# Altium PCB lps_regulator_rev_12.PcbDoc (part 2 of 2)
Units mil, origin at the board's own origin, x right, y up, seen from the top; angles counter-clockwise.
Board outline 5361 x 2466 mil, 2 copper layers (Top Layer, Bottom Layer); 130 components, 56 nets, 346 pads, 191 vias.
Unrouted connection lines stored in the file: 43.
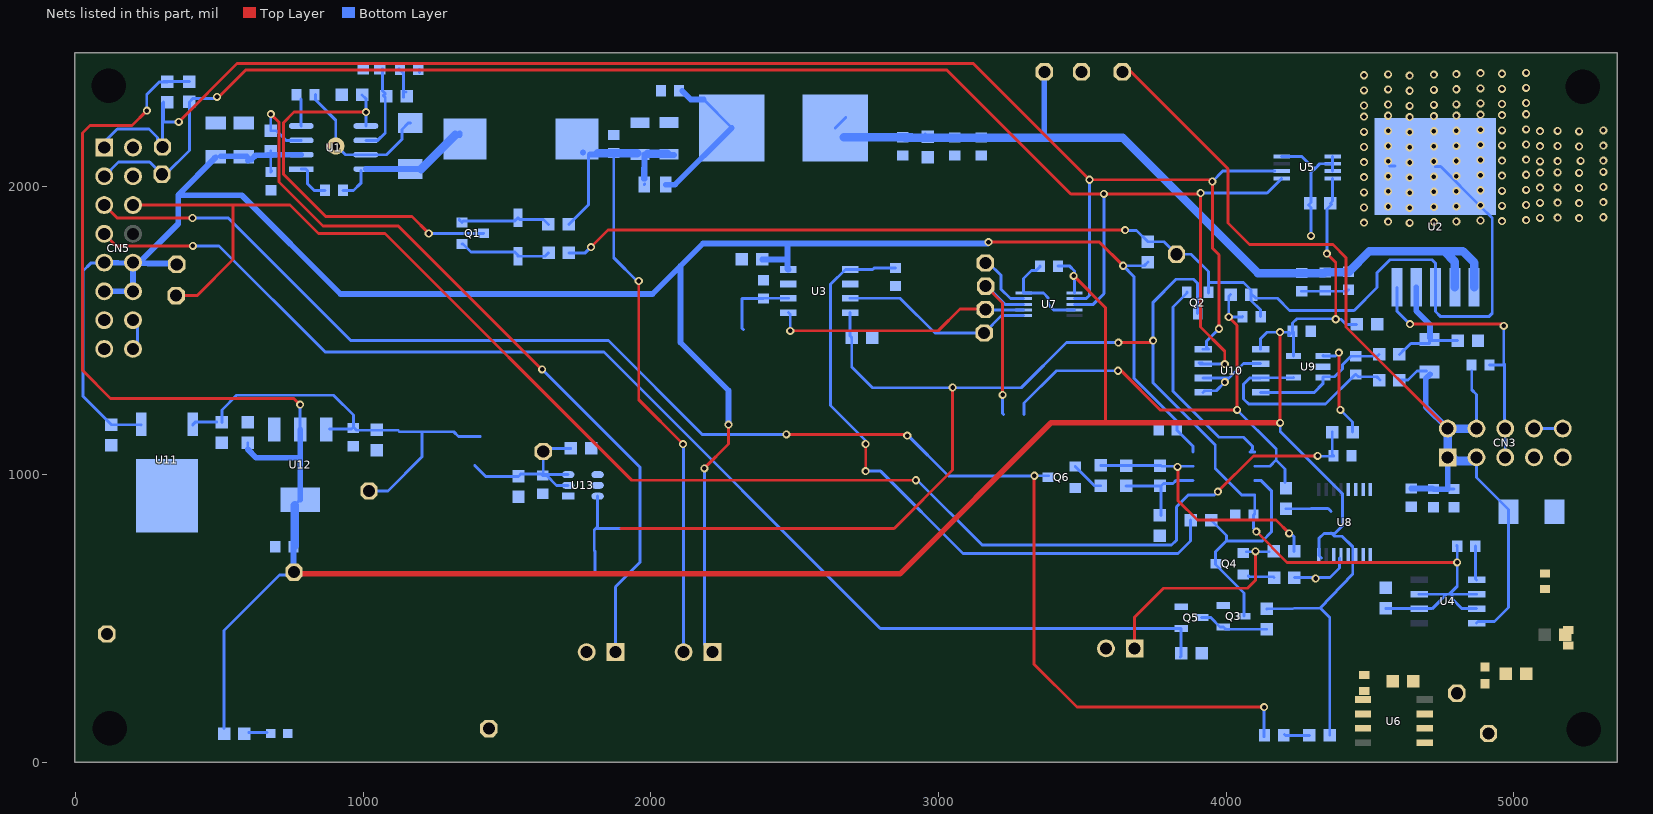
[diagram p2: the nets of this part, all layers, seen from the top]

## Part data (continued)
U8: library part CMP-001-1190-01, "IC I/O EXPANDER I2C 8B 16TSSOP", Case/Package=TSSOP, Frequency=400kHz, Max Operating Temperature=85°C, Min Operating Temperature=-40°C, Contact Plating=Gold, Interface=I2C, Lead Free="Lead Free", Mount="Surface Mount", Number of I/Os=8, Number of Outputs=8, Number of Pins=16, Packaging="Tape and Reel"
U10: "Current Monitor IC"
U11: library part CMP-001-0685-01, "STMICROELECTRONICS         LD29150DT33R            Fixed LDO Voltage Regulator, 4.3V to 30V, 400mV Dropout, 3.3Vout, 1.5Aout, TO-252-3", Case/Package=TO-252, Dropout Voltage=400mV, Input Bias Current=15mA, Max Input Voltage=30V, Max Operating Temperature=125°C, Max Output Current=1.5A, Max Output Voltage=3.333V, Min Input Voltage=4.3V, Min Operating Temperature=-40°C, Min Output Voltage=3.3V, Output Voltage Accuracy=1%, Package Quantity=1, Reference Voltage=1.2423V, Accuracy=1%, Contact Plating="Matte, Tin", Height=2.4mm, Lead Free="Lead Free", Length=6.6mm, Max Supply Voltage=30V, Min Supply Voltage=4.3V, Mount="Surface Mount", Nominal Output Voltage=3.3V, Number of Outputs=1, Number of Pins=3, Number of Regulators=1, Output Current=1.5A, Output Type=Fixed, Output Voltage=3.3V, Packaging="Tape and Reel", Polarity=Positive, Quiescent Current=15mA, Radiation Hardening=No, REACH SVHC="No SVHC", Termination=SMD/SMT, Weight=0.01lb, Width=6.2mm
U12: library part CMP-008-0010-01, "3.3 volt fixed regulator, 800mA", Component Name=LD1117S33, Pin Count=4

## Free pads (board coordinates)
  round 110 hole 120 unplated: 0(116,2352) 0(119,118) 0(5239,2348) 0(5243,115)

## Via types
v1: diameter 28, hole 16, Top Layer to Bottom Layer, 191 vias

## Nets (pads, with @x,y where several pads share a name; then routed paths per layer and width w, separated by ;. In a path a pad name is that pad's centre, name@x,y a point inside that pad or via, vN(x,y) a via of type N, cw(c..) or ccw(c..) an arc to the next point about the centre after c; other vN are vias at no path point)
3V3: 1.1 C27.1 C30.1 C36.1 C39.1 C43.1 C45.1 R13.1 R14.1 R24.1 R26.1 R29.1 R32.1 U5.8 U7.1 U8.16 U9.5 U10.5 U12.2 U12.4 | length 10929
  Top Layer w10: v1(248,2265) 197,2214 50,2214 24,2188 24,1363 122,1265 759,1265 v1(781,1243) ; v1(3470,1691) 3580,1581 3580,1182.12 ; 3580,1180 3580,1182.12 ; 3582,1180.12 3580,1182.12 ; v1(4187.15,1495) 4187.15,1180.85 v1(4187.88,1180.12) ; v1(4350,1768) 4381,1737 v1(4381,1540)
  Top Layer w20: 1.1@760,661 766,655 2866,655 3391,1180 3580,1180 ; 3582,1180.12 v1(4187.88,1180.12)
  Bottom Layer w10: v1(248,2265) 248,2321.12 292.31,2365.43 R13.1@319,2365.43 ; R13.1@306,2366.43 R14.1@396,2366.43 ; R32.1@516.57,118 516.57,458.57 709,651 750,651 1.1@760,661 1.1@757.5,663.5 ; 599,1088 C45.1@599,1110.57 ; C43.1@757.5,749 762,753.5 C43.1@770.21,761.72 ; U12.4@762,893.95 U12.4@781,912.95 ; 778,1059 781,1062 ; U12.2@781,1157.05 v1(781,1243) ; C30.1@3415.38,1724.56 3456.32,1724.56 3472.88,1708 U7.1@3472.88,1631.37 ; U10.5@4120,1436 4120,1473 4142,1495 v1(4187.15,1495) 4218.29,1495 4218.29,1483.31 4231.01,1496.03 C39.1@4231.01,1498 ; 4141,533.43 4327.43,536.43 4440,654 4440,749 4403.13,785.87 4376.49,785.87 4366.76,795.6 ; v1(4187.88,1180.12) 4187.88,1150.12 4405,933 4405,823 4377.6,795.6 4366.76,795.6 ; U9.5@4234,1412.4 4234,1495.01 C39.1@4231.01,1498 ; 4329.93,533.93 4360,503.87 R24.1@4360,94 ; 4331.5,710 4322.76,718.75 4322.76,778.76 4339.6,795.6 4366.76,795.6 ; v1(4350,1768) 4350,1923.43 4366,1939.43 C27.1@4362.43,1943 4370.17,1950.73 U5.8@4370.17,2029.41 ; 4364.76,797.6 4366.76,795.6 ; C36.1@4453.57,1522 4417.26,1522 4399.26,1540 v1(4381,1540) 4379,1542 4246,1542 4231.01,1527.01 C39.1@4231.01,1498
  Bottom Layer w20: 599,1088 628,1059 778,1059 ; 1.1@757.5,663.5 C43.1@757.5,749 ; U12.4@781,912.95 781,1062 U12.2@781,1157.05
  Bottom Layer w30: C43.1@762,753.5 U12.4@762,893.95
+5V0: +1.1 +2.1 C40.1 C41.1 C46.1 R17.1 U11.3 U12.3 U13.3 U13.4 | length 1532.8
  Bottom Layer w10: U11.3@407.9,1173.09 418.3,1183.5 C40.1@491,1183.5 ; C40.1@509,1181.43 509,1225 560,1276 897,1276 966,1207 C41.1@966,1165.87 ; U12.3@883.55,1159.05 959.18,1159.05 C41.1@966,1165.87 ; +2.1@1020,943 1085.98,943 1205,1062.02 1205,1149 ; 1121.6,1154.4 977.46,1154.4 C41.1@966,1165.87 ; 1127,1149 1205,1149 ; 1407,1132 1332,1132 1315,1149 1205,1149
+VIN_SW: +VIN_SW1.1 C1.1 C4.1 C5.1 C24.1 C29.1 C42.1 CN1.1 CN5.5 CN5.6 CN5.13 CN5.14 R1.1 R6.1 U1.2 U3.8 U11.1 | length 8111.5
  Top Layer w10: v1(2186,1022) 2270,1106 v1(2270,1174) ; v1(3174,1808) 3560,1808 v1(3642,1726)
  Top Layer w20: +VIN_SW1.1@352,1744 +VIN_SW1.1@357.75,1749.75
  Bottom Layer w10: CN5.5@100,1735 53,1735 26,1708 26,1272.43 C42.1@125,1173.43 228.03,1173.43 U11.1@228.37,1173.09 ; CN5.13@200,1735.03 CN5.13@200,1737 CN5.13@222,1737 ; +VIN_SW1.1@352,1731 +VIN_SW1.1@352,1734 ; 357,1971 357,1972 ; C5.1@479,2104.94 C5.1@487,2104.94 ; R1.1@679,2124.57 679,2112 679,2110.5 679,2052.5 C1.1@680,2051.5 ; C1.1@682,2055.5 C1.1@682.5,2056 ; v1(2186,1022) 2186,411 CN1.1@2214,383 ; 2470,1748 2475,1743 ; R6.1@3728,1738.57 3715.43,1726 v1(3642,1726) 3679,1689 3679,1336 3828.5,1186.5 C24.1@3828.5,1155 3884.72,1098.78 3884.72,1079
  Bottom Layer w20: CN5.6@100,1637 CN5.14@200,1637 200,1735.03 221.95,1734.59 252,1734 +VIN_SW1.1@352,1734 ; CN5.5@100,1737 CN5.13@199.96,1735.03 ; CN5.13@222,1737 357,1872 357,1971 578,1971 921,1628 2006,1628 2103,1725 ; 357,1972 C5.1@488,2103 ; C5.1@505,2107 C4.1@595,2107 ; C4.1@599.57,2092 C4.1@605.15,2097.59 ; C4.1@612.15,2095.59 627.07,2110.5 679,2110.5 R1.1@685,2110.5 ; R1.1@667.5,2112 679,2112 U1.2@785,2112 ; v1(2270,1174) 2270,1292 2103,1459 2103,1725 ; C29.1@2387,1748 2470,1748 ; U3.8@2478.43,1713 2476.81,1713 2475,1714.81 2475,1743 2475,1803 ; v1@3171,1803 2475,1803 ; 2103,1725 2181,1803 2475,1803
-2V5: C25.1 C31.2 Q2.3 U3.4 | length 5965.5
  Top Layer w10: 1896,813 2846,813 3049,1016 v1(3049,1303) ; v1(3625,1459) 3739.62,1459 v1(3746.31,1465.69) ; v1(4105,802) 4212,695 v1(4803,695)
  Bottom Layer w10: 1805.43,659 1805.43,734.06 1804.5,735 1803.43,736.06 1803.43,808 1808.43,813 ; 1815,925.2 1815,819.57 1808.43,813 ; 1896,813 1808.43,813 ; U3.4@2693,1563 2693,1481.57 C31.2@2698.57,1476 2698.57,1374.43 2770,1303 ; 2770,1302 3288,1302 3445,1459 v1(3625,1459) ; Q2.3@3901,1559.44 3901,1664 3886,1679 3826,1679 3746.31,1599.31 v1(3746.31,1465.69) 3746.31,1318.69 3962,1103 3962,1021 4054,929 4099.28,929 4099.28,863.79 C25.1@4094.5,859 4094.5,812.5 v1(4105,802) ; 4555,535.57 4556.57,534 4670.61,534 4716.17,534 4766.17,584 ; 4670.61,584 4766.17,584 ; 4801.56,753 4803.11,751.44 4803.11,611.72 4775.39,584 ; 4870.61,534 4820.05,534 4784.61,569.44 4784.61,584 ; 4870.61,584 4784.61,584 ; 4766.17,584 4775.39,584 ; 4775.39,584 4784.61,584
-5V0: -1.1 C28.2 C37.1 C38.1 R10.2 R31.1 U4.2 U4.3 U4.6 U4.7 U13.1 | length 631.8
  Bottom Layer w10: 1388,1032 1426,994 C37.1@1540,994 1548.8,1002.8 C38.1@1626,1002.8 ; 1712.64,962.6 1672.4,962.6 1638.5,996.5 C38.1@1624,996.5 C38.1@1626,998.5 ; 1712.64,1000 1638.5,1000 1627.5,1000 C38.1@1626,998.5 ; R31.1@1721.57,1091 1637,1091 -1.1@1626,1080 C38.1@1626,1002.8 ; C38.1@1626,998.5 C38.1@1626,1002.8
/INT: CN5.10 R29.2 U8.13
/RST: CN5.9
Current_Limit: CN5.3 LED1.2 Q6.3 U8.4 | length 5359.8
  Top Layer w10: CN5.3@100,1937 145,1892 v1(407,1892) ; v1(2471,1140) 2887,1140 v1(2891.5,1135.5) ; v1@3332,994 3332,341 3481,192 v1(4132,192)
  Bottom Layer w10: CN5.3@100,1937 CN5.3@109,1937 ; v1(407,1892) 531,1892 957,1466 1853,1466 2179,1140 v1(2471,1140) ; v1@2893,1137 3035,995 v1@3342,995 ; 3282.76,996 v1(3333.04,996) Q6.3@3383.32,996 ; LED1.2@4131,89 4132,90 4132,190 4131,191 v1(4132,192)
Debug_LED: LED2.2 U8.6
GND: C1.2 C2.2 C3.2 C4.2 C5.2 C6.2 C8.2 C9.2 C10.2 C11.2 C12.2 C13.2 C14.2 C15.2 C16.2 C17.2 C18.2 C19.2 C20.2 C22.1 C24.2 C25.2 C27.2 C28.1 C29.2 C30.2 C31.1 C33.2 C34.2 C36.2 C37.2 C38.2 C39.2 C40.2 C41.2 C42.2 C43.2 C45.2 C46.2 CN2.2 CN3.4 CN3.5 CN3.9 CN3.10 CN4.2 CN5.7 CN5.8 CN5.15 CN5.16 D2.1 D3.1 GND1.1 GND2.1 GND3.1 GND4.1 LED3.2 Q3.2 Q5.2 Q6.2 R5.2 R7.2 R18.1 R22.2 R23.2 R31.2 U1.7 U1.9 U3.5 U5.4 U5.5 U5.6 U5.7 U7.4 U7.10 U8.1 U8.2 U8.3 U8.8 U9.2 U10.1 U10.2 U10.6 U11.4 U12.1 U13.2 | length 2303
  Top Layer w10: CN5.8@110,1436 CN5.8@112.44,1433.56
  Bottom Layer w10: CN5.16@215,1437 CN5.15@215,1537 ; C20.2@835,2321 835,2302 905,2232 U1.9@905,2142 908.64,2142 938.64,2112 U1.7@1009.41,2112 1081,2112 1135,2166 1135,2200.04 1156.96,2222 D2.1@1164.46,2222 ; R5.2@1195.43,2398.03 R5.2@1195.43,2409 ; C30.2@3352.39,1724.56 3352.39,1722.59 3339.67,1709.87 3323.76,1709.87 3295.72,1681.83 U7.10@3295.72,1631.37 3364.51,1631.37 3380.88,1615 3380.88,1592 3400.57,1572.32 U7.4@3472.88,1572.32 ; U10.1@3920,1286 3925.5,1291.5 3965.5,1291.5 v1(3995.5,1321.5) 4010,1336 ; U10.2@3920,1336 4010,1336 ; U10.6@4120,1386 4060,1386 4010,1336 ; U5.4@4193,2106.18 4262.82,2106.18 4303.7,2065.3 4310.3,2065.3 ; R22.2@4237.43,642 4361,642 4394.5,675.5 4394.5,710 ; C12.2@4262.49,1637.5 4420,1637.5 C14.2@4425,1642.5 ; v1(4295,1830) 4295,1928.43 4286,1937.43 C27.2@4291.57,1943 4295,1946.43 4295,2050 4310.3,2065.3 ; U5.7@4370.17,2055 U5.5@4370.17,2080.59 ; U5.6@4370.17,2106.18 U5.5@4370.17,2080.59 ; CN3.9@5070,1160 CN3.10@5170,1160 ; 4310.3,2065.3 4325.59,2080.59 U5.5@4370.17,2080.59
  other v1: 4311,639
I2C_SCL: CN5.1 I2.1 R13.2 U5.2 U7.2 U8.14 U10.4 | length 5728.4
  Top Layer w10: v1(359,2226) 562,2429 3121,2429 v1(3525,2025) 3946,2025 v1(3952,2019) 3952,1787 3975,1764 v1(3975,1507)
  Bottom Layer w10: CN5.1@100,2135 CN5.1@101,2136 ; CN5.1@100,2137 100,2156 145.5,2201.5 255.5,2201.5 285.5,2171.5 285.5,2155.57 I2.1@302.5,2138.57 302.5,2292.07 306,2295.57 306,2226 v1(359,2226) ; U7.2@3472.88,1611.69 3513.45,1611.69 3519,1617.23 ; 3519.23,1617.46 3525,1623.23 v1(3525,2025) ; U10.4@3920,1436 3939,1436 3931,1444 3931,1463 v1(3975,1507) ; v1(3952,2019) 3988,2055 U5.2@4169,2055
I2C_SDA: CN5.2 I1.1 R14.2 U5.1 U7.3 U8.15 U10.3 | length 5782.4
  Top Layer w10: v1(492,2313) 498,2313 592,2407 3029,2407 3460,1976 v1(3575,1976) 3908,1976 v1(3911,1979) 3911,1513 3995,1429 v1(3995,1384)
  Bottom Layer w10: CN5.2@100,2037 150,2087 258,2087 I1.1@301,2044 313,2044 396,2127 R14.2@396,2295.57 407.43,2307 486,2307 v1(492,2313) ; U7.3@3472.88,1592 3538,1592 3575,1629 v1(3575,1976) ; v1(3911,1979) 4142.59,1979 U5.1@4193,2029.41 ; U10.3@3920,1386 3917.5,1388.5 3905.5,1388.5 3910,1384 v1(3995,1384)
I_Sample: C34.1 CN5.11 I_sample1.1 R25.2 U6.3 | length 5435.4
  Top Layer w10: CN5.11@200,1937 548,1937 ; I_sample1.1@350,1622 422,1622 548,1748 548,1937 ; v1(2921.5,980.5) 1933.5,980.5 1076,1838 845,1838 746,1937 548,1937 ; v1(3971,941) 4095,1065 v1(4318,1065)
  Bottom Layer w10: I_sample1.1@348.5,1620.5 I_sample1.1@350,1622 351.5,1623.5 I_sample1.1@356.5,1623.5 ; I_sample1.1@354,1616 359,1621 376,1621 371,1616 I_sample1.1@359,1616 ; v1@2924,983 3152,755 3551,755 3551.09,754.91 3809.91,754.91 3827,772 3827,888.02 3867.98,929 3884.72,929 3959,929 v1(3971,941) ; v1(4318,1065) 4318.97,1064.03 4373.01,1064.03 C34.1@4373.01,1066 4368.57,1070.44 R25.2@4368.57,1148
IA_TP: IA_TP1.1 R20.1 U7.7 | length 935.2
  Top Layer w10: v1(2484.72,1500) 2999,1500 3075,1576 3157,1576 IA_TP1.1@3166.93,1585.93 ; IA_TP1.1@3149.95,1561.07 IA_TP1.1@3162.88,1574
  Bottom Layer w10: 2478.43,1563 2484.72,1556.72 v1(2484.72,1500) ; IA_TP1.1@3162.88,1574 3164.57,1572.32 U7.7@3295.72,1572.32
NetC6_1: C6.1 C8.1 C9.1 CN1.2 FB1.1 L1.2 R3.1 | length 2542.1
  Top Layer w10: v1(1958,1673) 1958,1260 v1(2112,1106)
  Bottom Layer w10: R3.1@1715,1870 1783,1938 1783,2107.12 L1.2@1788.88,2113 ; C6.1@1871,2117.5 1871,2116.5 1871,1754 v1@1954,1671 ; FB1.1@1977.2,2008 FB1.1@1979,2009.8 ; C8.1@2058.44,2109.32 2060,2110.88 C8.1@2063,2113.88 ; CN1.2@2114,383 v1@2114,1101
  Bottom Layer w20: L1.2@1764.13,2119.52 L1.2@1764.19,2119.57 ; L1.2@1788.88,2113 1819.5,2113 L1.2@1816,2116.5 ; FB1.1@1975.78,2028.88 1977.65,2111.53 1977.69,2113.2 1977.7,2112.13 FB1.1@1979,2028.8 ; C8.1@2060,2110.88 C8.1@2081,2110.88
  Bottom Layer w30: L1.2@1816,2116.5 1871,2116.5 C9.1@1953,2116.5 ; C9.1@1989,2114.88 C8.1@2056.44,2114.88
NetC7_1: C7.1 U1.1 | length 139.6
  Bottom Layer w10: U1.1@785,2062 801.16,2062 806,2057.16 806,2012 830,1988 C7.1@867.5,1988
NetC7_2: C7.2 D2.2 L1.1 U1.8 | length 504.9
  Bottom Layer w10: C7.2@930.5,1988 967,1988 992,2013 U1.8@992,2057.53 ; L1.1@1336,2180.53 L1.1@1340.47,2185
  Bottom Layer w20: U1.8@1009.41,2062 D2.2@1164.46,2062 D2.2@1202,2062 ; L1.1@1320.53,2180.53 1336,2180.53 L1.1@1336,2187
  Bottom Layer w30: D2.2@1202,2062 L1.1@1320.53,2180.53
NetC15_1: C15.1 FB1.2 L2.1 | length 537
  Bottom Layer w10: L2.1@2183.97,2304 2281,2206.97 L2.1@2281,2205
  Bottom Layer w20: FB1.2@2052,2008 2084,2008 L2.1@2281,2205 ; C15.1@2109.14,2334 2139.14,2304 L2.1@2183.97,2304
NetC20_1: C20.1 U1.4 | length 94.6
  Bottom Layer w10: C20.1@783.57,2306 783.57,2213.43 U1.4@785,2212
NetC21_1: C21.1 C22.2 U1.6 | length 302.3
  Bottom Layer w10: U1.6@1009.41,2162 1051,2162 1077,2188 1077,2311 C21.1@1070,2318 ; C22.2@1067.54,2411 1067.54,2334.46 C21.1@1075,2327 ; C21.1@1076,2322 C21.1@1076,2326
NetC21_2: C21.2 R5.1 | length 105.6
  Bottom Layer w10: R5.1@1124.5,2411 1140.43,2395.07 C21.2@1140.43,2312
NetC23_1: C23.1 Q2.2 R6.2 R8.2 R9.1 TP1.1 U2.3 U2.6 | length 4431
  Top Layer w10: v1(1792,1791) 1851,1850 v1(3649,1850)
  Bottom Layer w10: R8.2@1715.43,1771 1772,1771 v1(1792,1791) ; v1(3649,1850) 3650,1849 3688.43,1849 R6.2@3728,1809.43 3783.57,1809.43 TP1.1@3827,1766 3878,1766 3938.4,1705.6 3938.4,1662.4 ; Q2.2@3938.4,1631.29 Q2.2@3938.4,1634.24 3938.4,1662.4 ; C23.1@4119.99,1549 4119.99,1572.01 4086.43,1605.57 R9.1@4086.43,1626 R9.1@4086.43,1630 ; U2.6@4568,2072.29 U2.6@4586.7,2072.29 ; U2.6@4727,2071 4745.7,2071 4882.42,1934.28 4925,1891.7 4925,1561 4913,1549 4746,1549 4728,1567 U2.3@4728,1651 4728,1735 4716,1747 4569,1747 4524,1702 4524,1650 4445,1571 4220,1571 4178,1613 4103.43,1613 R9.1@4086.43,1630 ; 3938.4,1662.4 3944,1668 4060,1668 4086.43,1641.57 R9.1@4086.43,1630
  other v1: 4638,1874.86 4479,1876.14 4722,1878.14 4563,1879.43 4800,1880 4959,1881.43 4884,1883.29 5043,1884.71 5227,1891.29 5091,1892.29 5152,1893.14 5311,1894.57 4638,1927.43 4479,1928.71 4722,1930.71 4563,1932 4800,1932.57 4959,1934 4884,1935.86 5043,1937.29 5227,1943.86 5091,1944.86 5152,1945.71 5311,1947.14 4638,1980 4479,1981.29 4722,1983.29 4563,1984.57 4800,1985.14 4959,1986.57 4884,1988.43 5043,1989.86 5227,1996.43 5091,1997.43 5152,1998.29 5311,1999.71 4638,2032.57 4479,2033.86 4722,2035.86 4563,2037.14 4800,2037.71 4959,2039.14 4884,2041 5043,2042.43 5227,2049 5091,2050 5152,2050.86 5311,2052.29 4638,2085.14 4479,2086.43 4722,2088.43 5091,2089 4563,2089.71 4800,2090.29 5152,2089.86 5232,2090.57 5311,2091.29 4959,2091.71 4884,2093.57 5043,2095 4638,2137.71 4479,2139 4722,2141 5227,2140.57 4563,2142.29 5091,2141.57 5152,2142.43 4800,2142.86 4959,2144.29 5311,2143.86 4884,2146.14 5043,2147.57 4638,2190.29 4479,2191.57 5227,2193.14 4722,2193.57 5091,2194.14 4563,2194.86 4800,2195.43 5152,2195 5311,2196.43 4959,2196.86 4884,2198.71 5043,2200.14 4638,2242.86 4479,2244.14 4722,2246.14 4563,2247.43 4800,2248 4959,2249.43 4884,2251.29 5043,2252.71 4638,2281.86 4479,2283.14 4722,2285.14 4563,2286.43 4800,2287 4959,2288.43 4884,2290.29 5043,2291.71 4638,2334.43 4479,2335.71 4722,2337.71 4563,2339 4800,2339.57 4959,2341 4884,2342.86 5043,2344.29 4638,2387 4479,2388.29 4722,2390.29 4563,2391.57 4800,2392.14 4959,2393.57 4884,2395.43 5043,2396.86
NetC23_2: C23.2 R9.2 R12.1 U3.2 | length 1751.3
  Top Layer w10: v1(3624,1361) 3635,1361 3771,1225 v1(4038,1225) 4038,1519 v1(4009,1548)
  Bottom Layer w10: 3297.43,1209 3297.43,1248.43 3410,1361 v1(3624,1361) ; R9.2@4015.57,1626 4009,1619.43 v1(4009,1548) 4056,1548 C23.2@4057,1549 ; v1(4038,1225) 4174,1089 4174,1051 ; 4099.28,1029 4152,1029 4173.5,1050.5 4204,1020 R12.1@4204,972.43
NetC26_1: C26.1 R16.1 R18.2 U6.6
NetC32_1: C32.1 R19.1 R21.2 R27.2 U6.1 | length 953.6
  Top Layer w10: v1@3833,1032 3833,909 3900,842 4173,842 v1(4219,796)
  Bottom Layer w10: R27.2@3564,1032 3564.57,1031.43 C32.1@3652,1031.43 3774,1031.43 3776.43,1029 v1@3829,1029 ; v1(3831,1027) v1@3829,1029 ; 3884.72,1029 v1@3829,1029 ; v1(4219,796) 4223.81,796 4236.43,783.38 R19.1@4236.43,733
NetC32_2: C32.2 R20.2 R21.1 U6.2 | length 342.9
  Bottom Layer w10: C32.2@3652,960.57 R21.1@3774,960.57 ; R20.2@3773,858.43 3774,859.43 R21.1@3774,960.57 ; 3884.72,979 3825,979 3815,969 3782.43,969 R21.1@3774,960.57
NetC35_1: C35.1 R28.1 U9.3 U10.8 | length 487.7
  Bottom Layer w10: U10.8@4120,1286 4306,1286 4336,1316 U9.3@4336,1337.6 4338.4,1340 4377,1340 4404,1367 4404,1382 4433.5,1411.5 C35.1@4451,1411.5 4525.06,1411.5 R28.1@4531.57,1418
NetC35_2: C35.2 R30.1 U9.4 U10.7 | length 767.5
  Bottom Layer w10: U9.4@4234,1337.6 4233.2,1336.8 4120.8,1336.8 U10.7@4120,1336 4082,1336 4060,1314 4060,1263.36 4078.36,1245 4345.53,1245 4449.03,1348.5 C35.2@4451,1348.5 4459.5,1340 4523.57,1340 R30.1@4534.57,1329
NetC44_1: C44.1 U13.5
NetC44_2: C44.2 U13.6
NetCN2_1: CN2.1 R1.2 U1.3 | length 2769.7
  Top Layer w10: v1(679,2253) 707,2225 707,2017 860,1864 1122,1864 1620,1366 v1(1622.25,1366)
  Bottom Layer w10: v1(679,2253) R1.2@679,2195.43 698.57,2195.43 732,2162 U1.3@785,2162 ; v1(1622.25,1366) 1963,1025.25 1963,696 1877,610 CN2.1@1877,383
NetCN3_3: CN3.3 CN3.8 R4.2 U2.5 | length 982.6
  Top Layer w10: v1@4644,1524 4958,1524 v1(4965,1517)
  Bottom Layer w10: U2.5@4594,1651 4594,1568 v1(4639,1523) ; R4.2@4915.5,1381 4964.21,1381 4967.21,1384 ; v1(4965,1517) 4965,1386.21 4967.21,1384 ; CN3.3@4970,1060 CN3.8@4970,1160 4967.21,1162.79 4967.21,1384
NetCN4_1: CN4.1 Q4.1 R19.2 | length 760.7
  Top Layer w10: CN4.1@3682,396 3682,505 3782,605 4074,605 4102,633 v1(4102,733)
  Bottom Layer w10: Q4.1@4069.84,732 R19.2@4148.57,732
NetD1_1: D1.1 Q1.1 R8.1 | length 325.4
  Bottom Layer w10: Q1.1@1343.76,1801.6 1346.71,1801.6 1375,1773.31 1527.25,1773.31 1538,1762.56 D1.1@1538,1759.07 1632.64,1759.07 R8.1@1644.57,1771
NetD1_2: D1.2 Q1.2 R3.2 | length 330.6
  Bottom Layer w10: Q1.2@1333.98,1886.18 Q1.2@1343.76,1876.4 1349.54,1882.18 1527.25,1882.18 D1.2@1538,1892.93 1544.28,1886.65 1627.48,1886.65 R3.2@1644.13,1870
NetLED1_1: LED1.1 R24.2 | length 87.8
  Bottom Layer w10: LED1.1@4202.96,97.04 4207,93 R24.2@4289.13,93
NetLED2_1: LED2.1 R26.2
NetLED3_1: LED3.1 R32.2 | length 63.5
  Bottom Layer w10: R32.2@602.43,103 LED3.1@665.94,103
NetQ1_3: Q1.3 R7.1 U1.5 | length 1376.1
  Top Layer w10: v1(1010,2260) 760,2260 723,2223 723,2044 870,1897 1170,1897 v1@1228,1839
  Bottom Layer w10: R7.1@996.43,2320 1010,2306.43 v1(1010,2260) 1010,2212.59 U1.5@1009.41,2212 ; v1(1228,1838) 1417.56,1838 Q1.3@1418.56,1839
NetQ2_1: Q2.1 U3.1 | length 759.9
  Bottom Layer w10: Q2.1@3863.6,1634.24 3863.6,1631.29 3815,1582.69 3815,1290 3975,1130 4060.45,1130 4090.92,1099.53 4090.92,1087.37 4082.55,1079 4099.28,1079
NetQ3_1: Q3.1 Q5.3 R17.2 | length 243.3
  Bottom Layer w10: Q5.3@3914.43,503 3946.35,503 3978.76,470.6 Q3.1@3990.57,470.6 3998.6,462.57 R17.2@4141,462.57
NetQ3_3: Q3.3 Q4.3 R15.2 U3.3 | length 798.8
  Bottom Layer w10: R15.2@3947.43,842 4001,788.43 4001,769 ; Q3.3@4061.43,508 4062,508.57 4062,589 3963,688 3963,732 4000,769 4001,769 ; 4099.28,979 4122,979 4157,944 4157,800 4126,769 4001,769
NetQ4_2: Q4.2 R22.1 | length 92.3
  Bottom Layer w10: Q4.2@4076.82,648.18 4080.13,644.87 4163.7,644.87 R22.1@4166.57,642
NetQ6_1: Q6.1 R27.1 | length 116.6
  Bottom Layer w10: Q6.1@3475.24,1028.4 3542.51,961.13 R27.1@3564,961.13
NetR10_1: R10.1 U4.1 | length 119.3
  Bottom Layer w10: R10.1@4866.11,751.44 4866.11,638.5 U4.1@4870.61,634
NetR11_1: R11.1 U3.6 | length 272.4
  Bottom Layer w10: 2321.57,1504 2316.72,1508.85 2316.72,1612.5 R11.1@2391.72,1612.5 2392.21,1613 U3.6@2478.43,1613
NetR11_2: R11.2 U3.7
NetR25_1: R25.1 U9.1 | length 358.3
  Top Layer w10: v1(4392,1424) 4392,1230 v1(4397,1225)
  Bottom Layer w10: U9.1@4337.3,1413.7 U9.1@4336,1412.4 4380.4,1412.4 v1(4392,1424) ; v1(4397,1225) 4439.43,1182.57 R25.1@4439.43,1148
NetSpare_1_1: Spare_1.1 U7.9 | length 212.4
  Bottom Layer w10: Spare_1.1@3162.88,1736 3173.88,1736 3217.88,1692 3217.88,1644 3250.2,1611.69 U7.9@3295.72,1611.69
OUTPUT_ENB: CN5.4 Q5.1 R23.1 U8.5 | length 4423.5
  Top Layer w10: CN5.4@100,1837 142,1795 v1(408,1795)
  Bottom Layer w10: CN5.4@100,1826 CN5.4@100,1837 ; v1(408,1795) 499,1795 868,1426 1837.37,1426 2797.77,465.6 Q5.1@3843.57,465.6 3843.57,369 R23.1@3840.57,366
Pwr_Out: C16.1 C17.1 C18.1 CN3.1 CN3.2 CN3.6 CN3.7 D3.2 PWR_OUT1.1 R2.2 R4.1 R30.2 U4.4 | length 3671.4
  Top Layer w10: PWR_OUT1.1@3639,2386 3655,2402 3667,2402 4006,2063 4006,1875 4081,1800 4371,1800 4417,1754 4417,1513 CN3.6@4770,1160
  Bottom Layer w10: R30.2@4605.43,1329 4632,1329 4663,1360 R2.2@4696,1360 ; C18.1@4717.03,951.5 4719.03,949.5 C18.1@4721,949.5 ; 4770,949.5 C17.1@4792,949.5 ; 4853.5,1360 4853.5,1295 4870,1278.5 CN3.7@4870,1160 ; CN3.2@4870,1060 4870,1047.5 4870,989.5 4981,878.5 D3.2@4981,871 4981,537.76 4933,489.76 4876.37,489.76 U4.4@4870.61,484
  Bottom Layer w20: C16.1@4643,951.5 C18.1@4717.03,951.5 ; R2.2@4698.36,1338.28 4694,1333.91 4694,1236 CN3.6@4770,1160 ; R2.2@4701.5,1341.41 R2.2@4709,1348.91 ; C18.1@4721,949.5 4770,949.5 CN3.1@4770,1060
  Bottom Layer w30: CN3.1@4788.31,1060.21 4770,1078.53 CN3.6@4770,1160 CN3.7@4870,1160 ; 4803,1047.5 CN3.2@4870,1047.5
Pwr_Out_Sample: C19.1 R2.1 R28.2 U2.4 | length 422
  Bottom Layer w10: R28.2@4602.43,1418 4619.09,1434.65 4620.57,1434.65 4641.91,1456 4707,1456 R2.1@4707,1470.09 ; R2.1@4711.91,1466 C19.1@4804.57,1466
  Bottom Layer w20: U2.4@4661,1651 4661,1569 4709,1521 R2.1@4709,1475.88
REG_VIN: C2.1 C3.1 C10.1 C11.1 C12.1 C13.1 C14.1 L2.2 REG_IN1.1 U2.1 U2.2 | length 3031.8
  Bottom Layer w10: L2.2@2641,2205 L2.2@2677.5,2241.5 ; C10.1@2954,2183.43 C10.1@2963,2174.43 ; 3359,2171.5 3368,2180.5 ; C13.1@4341.5,1700.5 C13.1@4344,1703
  Bottom Layer w20: 3368,2180.5 REG_IN1.1@3368,2388
  Bottom Layer w30: L2.2@2670.5,2172.5 C11.1@2876,2172.5 2907,2172.5 ; C11.1@2883,2171 2954,2171 2976,2171 C3.1@3145,2171 ; 3086,2171.5 3359,2171.5 3639.76,2171.5 4110.76,1700.5 C12.1@4262.49,1700.5 C13.1@4341.5,1700.5 ; C13.1@4344,1703 4422.5,1703 C14.1@4425,1705.5 ; C14.1@4424,1703 4498,1777 4758,1777 ; U2.2@4795,1651 4795,1740 4758,1777 ; U2.1@4862,1651 4862,1737 4822,1777 4758,1777
V_offset_adj: OSA_TP1.1 R12.2 U7.8 | length 791.9
  Top Layer w10: OSA_TP1.1@3163.88,1655 3165,1655 3223,1597 v1(3223,1277)
  Bottom Layer w10: OSA_TP1.1@3163.88,1655 3167.88,1655 3230.88,1592 U7.8@3295.72,1592 ; v1(3223,1277) 3223,1212.57 3226.57,1209 ; R12.2@4208,881.57 4294,881.57 4295,882.57 4354.59,882.57 4364.76,872.4
VA_TP: U6.5 U7.6 VA_TP1.1 | length 678
  Bottom Layer w10: 2693,1613 2866.72,1613 2987.72,1492 VA_TP1.1@3158.88,1492 3219.51,1552.63 U7.6@3295.72,1552.63
VA_TP_GAIN: C26.2 R15.1 R16.2 U6.7 | length 2288
  Top Layer w10: v1(2746.5,1106.5) 2747,1106 v1(2747,1012)
  Bottom Layer w10: v1(2746.5,1106.5) 2746.5,1118.5 2625,1240 2625,1661.73 2676.27,1713 2693,1713 2771.22,1713 2776.72,1718.5 C26.2@2850.72,1718.5 ; v1(2747,1012) 2799,1012 3085,726 3833,726 3876.57,769.57 R15.1@3876.57,842
pads on no net: C33.1 CN5.12 U4.5 U4.8 U5.3 U6.4 U6.8 U7.5 U8.7 U8.9 U8.10 U8.11 U8.12
copper on no net: | length 2316.1
  Bottom Layer w10: 2316.72,1675.5 2391.72,1675.5 2404.21,1663 2478.43,1663 2532,1663 2556,1639 2556,1216 2697,1075 2865.63,1075 3153.06,787.57 3773,787.57 ; 2693,1663 2769.22,1663 2776.72,1655.5 2850.72,1655.5 2851.78,1656.57 2933.72,1656.57
  other v1: 408,709 4575,1178 3287,1408 3343,1480 2777,1576 3272,1725 852,1794 672,1820 1229,1921 1024,1939 2467,1982 2864,2010 1509,2038 1461,2258 1855,2327 2452,2330 1281,2338

## Polygon pours and split planes (outlines as drawn)
GND on Top Layer "top" (solid, remove dead copper, shelved, pour order 0): -2,0 5359,0 5359,2466 -2,2466
GND on Bottom Layer "bottom" (solid, remove dead copper, shelved, pour order 2): -2,1 5359,1 5359,2466 -2,2466

## Keep-outs
Keep-Out Layer:
  circle w10: c119,118 r110
  circle w10: c5243,115 r110
  circle w10: c5239,2348 r110
  circle w10: c116,2352 r110

## Other copper
Top Layer:
  rectangle net NetC23_1: 5104,1857 5353,2226
  rectangle net NetC23_1: 4060,1857 5113,2459
Bottom Layer:
  rectangle net Pwr_Out: 4712,1031 4919,1214
  rectangle net +VIN_SW: 55,1593 257,1771
  rectangle net NetC23_1: 5113,1855 5352,2227
  rectangle net NetC23_1: 4423,1855 5113,2460

## Silkscreen, mask and mechanical layers (free items; w line width, h text height)
Bottom Overlay:
  text "OC_DISABLE" at 3497,253 h25
  text "Lab Power Supply Regulator" at 1562,247 h50
  text "Rev E" at 1087,166 h50
  text "SW_BYPASS" at 2113,29 h25
Mechanical 1:
  lines w10: -2,2 -2,2463 5357,2463 5357,-5.21 1,0.14

## Text inside footprints (layer, text, board x,y; h text height)
CN3: Top Overlay "1" at 4692,1002 h25; Top Overlay "5" at 5162,965 h25; Top Overlay "10" at 5153,1232 h25; Top Overlay "6" at 4657,1154 h25
CN5: Bottom Overlay "9" at 180,2237 h25 r270; Bottom Overlay "16" at 180,1357 h25 r270; Bottom Overlay "8" at 62,1359 h25 r270; Bottom Overlay "1" at 35,2221 h25 r270
U4: Bottom Overlay "1" at 4920.61,674 h25
U5: Bottom Overlay "1" at 4170.17,2001 h25 r180
U7: Bottom Overlay "1" at 3463.04,1651.06 h25
U9: Bottom Overlay "*" at 4385,1434 h50
U10: Bottom Overlay "1" at 3878,1217 h25